# Altium PCB PCB.PcbDoc
Units mm, origin at the board's own origin, x right, y up, seen from the top; angles counter-clockwise.
Board outline 78.9 x 50.1 mm, 2 copper layers (Top Layer, Bottom Layer); 36 components, 42 nets, 144 pads, 0 vias.
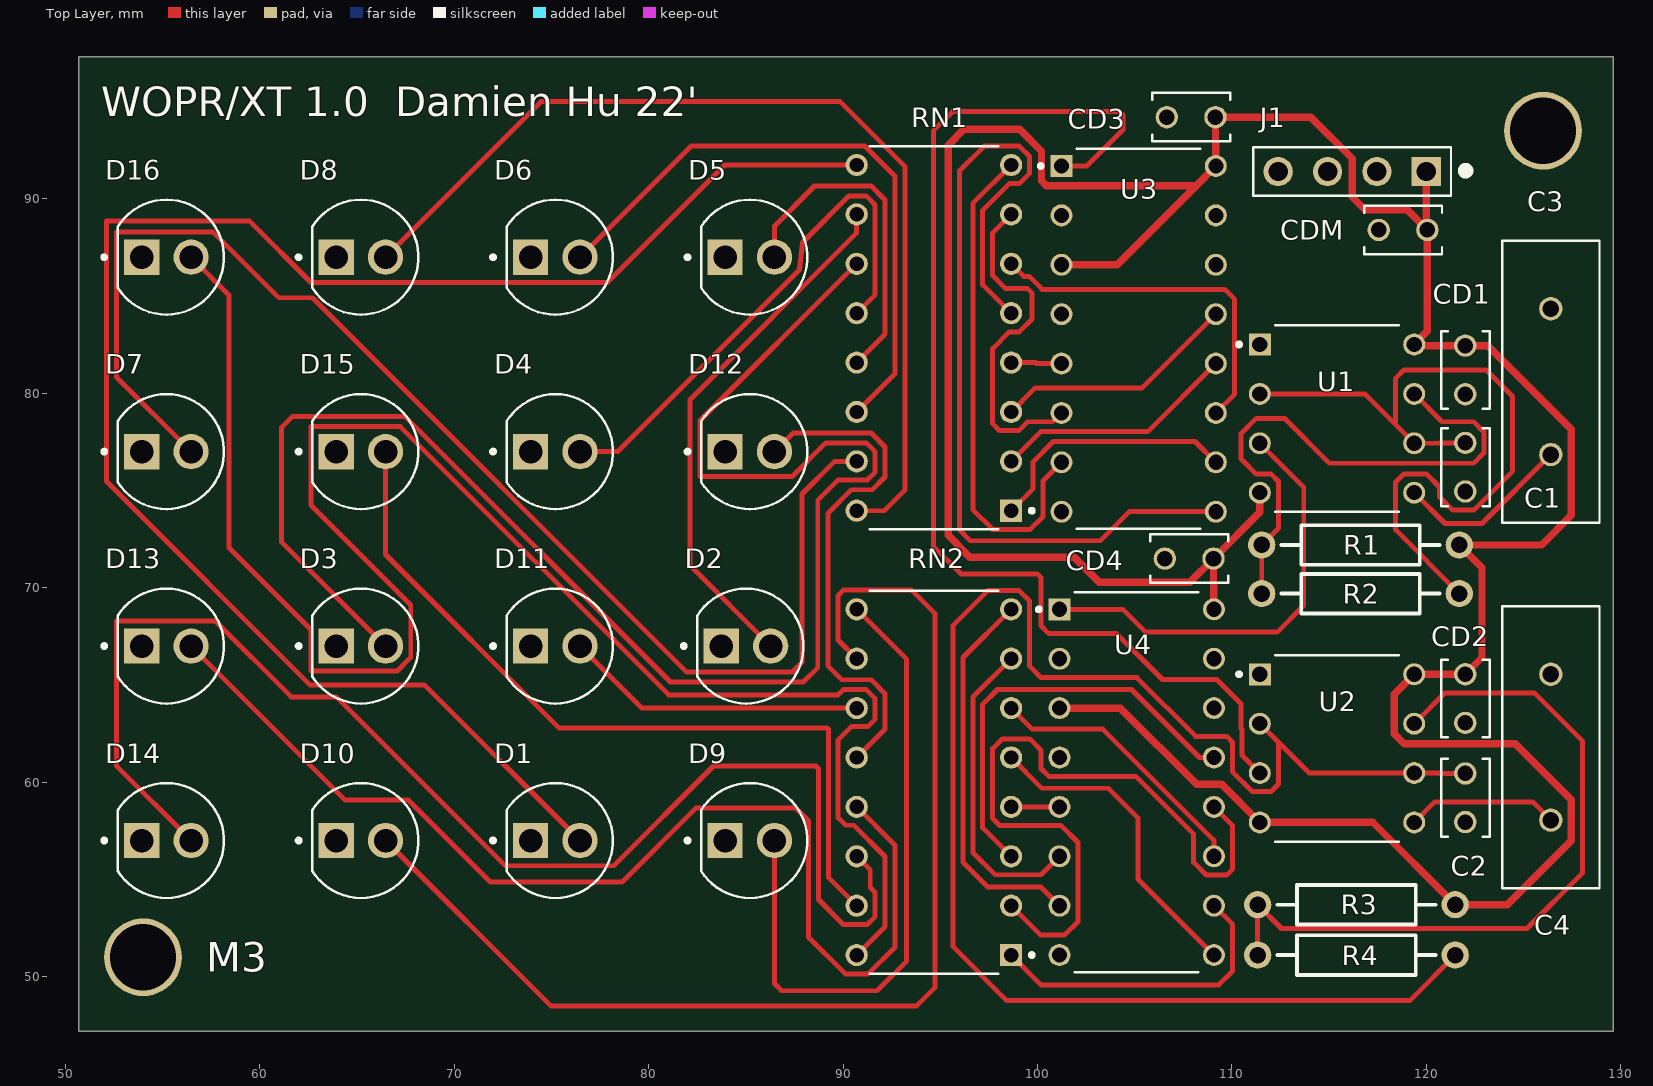
[diagram p0: Top Layer view]
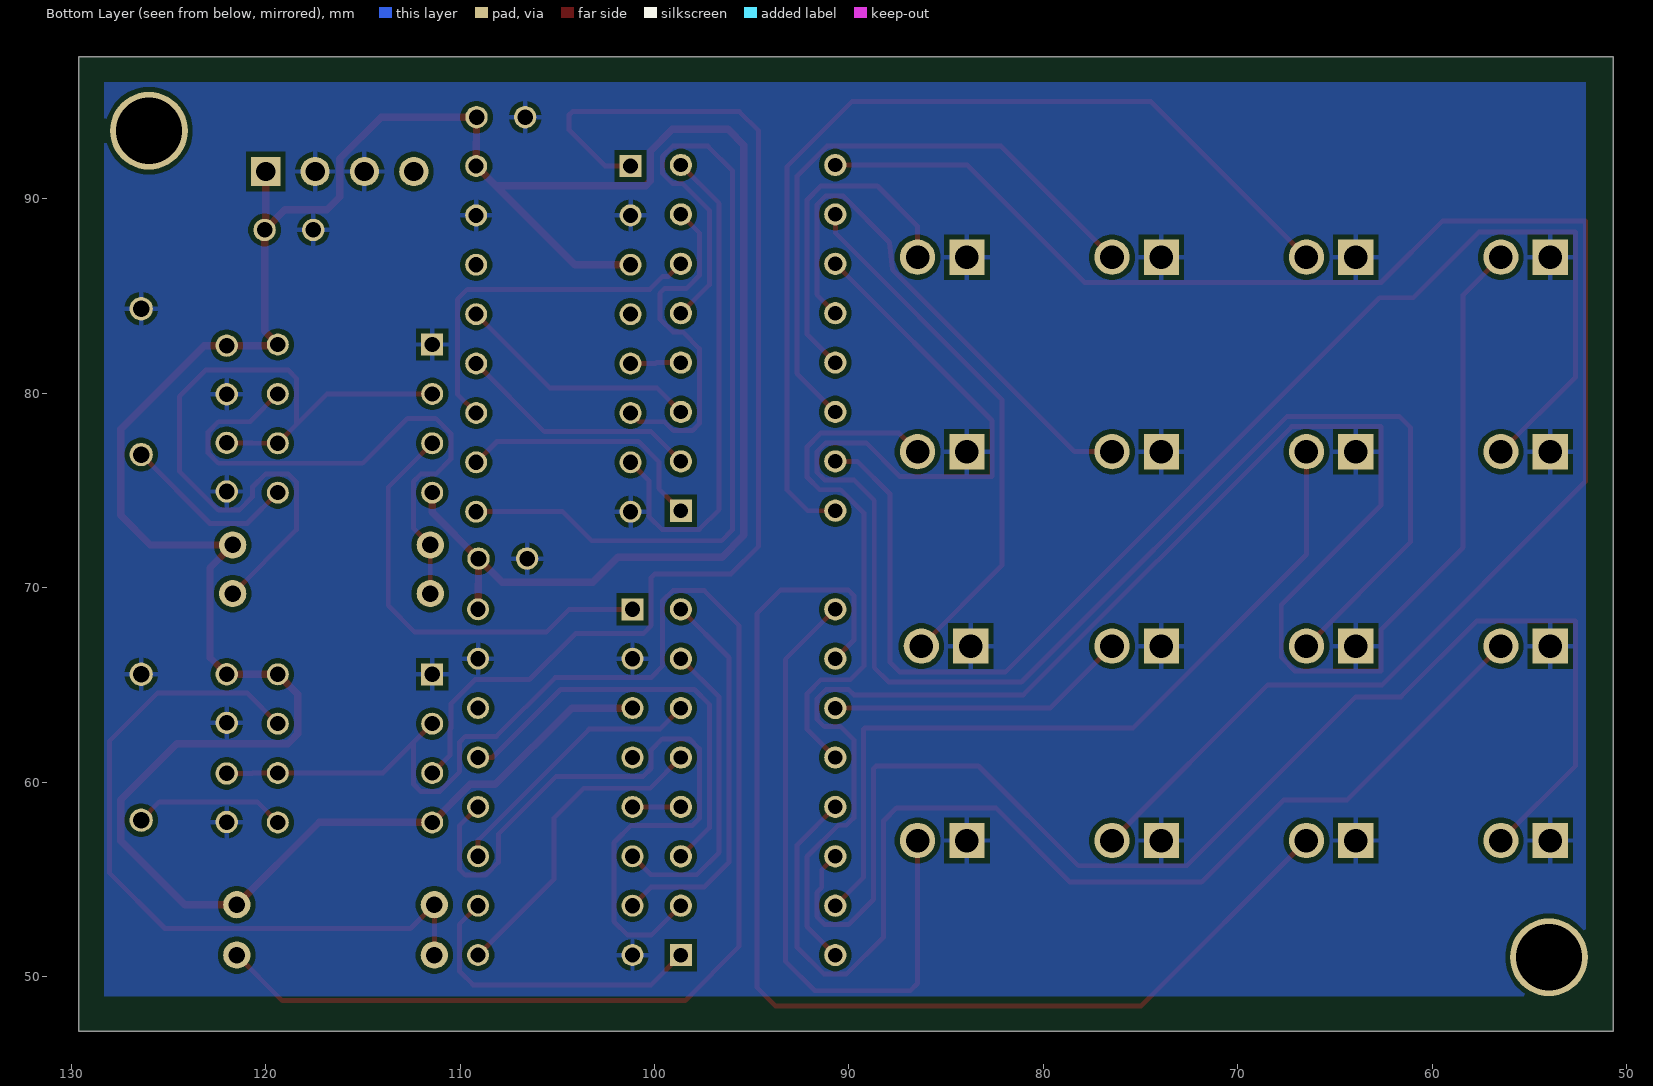
[diagram p1: Bottom Layer view, seen from below]

## Layer stack, top to bottom
Top Solder: solder mask 0.0102, Solder Resist, Dk 3.5
Top Layer: signal copper 0.0356
Dielectric 1: dielectric 0.32, FR-4, Dk 4.8
Bottom Layer: signal copper 0.0356
Bottom Solder: solder mask 0.0102, Solder Resist, Dk 3.5

## Board outline
50.7,47.2 129.6,47.2 129.6,97.3 50.7,97.3

## Design rules (kind name [scope] priority, off if disabled: settings)
BoardOutlineClearance [All] p1: gap=0.2 ignorepadtopadclearanceinfootprint=FALSE except(0.4: Arc-SplitBarrior Arc-SplitContinuation Track-SplitBarrior Track-SplitContinuation SMDPad-SplitBarrior SMDPad-SplitContinuation THPad-SplitBarrior THPad-SplitContinuation Via-SplitBarrior Via-SplitContinuation Fill-SplitBarrior Fill-SplitContinuation Poly-SplitBarrior Poly-SplitContinuation Region-SplitBarrior Region-SplitContinuation Text-SplitBarrior Text-SplitContinuation)
Clearance "Clearance Bottom Layer" [OnLayer('Bottom Layer')] p1: gap=0.203 ignorepadtopadclearanceinfootprint=TRUE except(0.254: Arc-Text Track-Text SMDPad-Text THPad-Text Via-Text Fill-Text Poly-Text Region-Text Text-Text)
Clearance "Clearance Top Layer" [OnLayer('Top Layer')] p2: gap=0.203 ignorepadtopadclearanceinfootprint=TRUE except(0.254: Arc-Text Track-Text SMDPad-Text THPad-Text Via-Text Fill-Text Poly-Text Region-Text Text-Text)
Clearance [All] p3: gap=0.2 ignorepadtopadclearanceinfootprint=FALSE except(0.089: Arc-Arc Arc-Track Arc-SMDPad Track-Track Track-SMDPad SMDPad-SMDPad; 0.127: Arc-Via Track-Via SMDPad-Via THPad-Via Via-Via; 0.254: Arc-Text Track-Text SMDPad-Text THPad-Text Via-Text Fill-Text Poly-Text Region-Text Text-Text)
HoleSize [All] p1: absolutevalues=TRUE maxlimit=6.3 minlimit=0.2 maxpercent=80.000 minpercent=20.000
MinimumAnnularRing [All] p1: minimumring=0.076
MinimumSolderMaskSliver [All] p1: minsoldermaskwidth=0.1
PolygonConnect PolygonConnect_1 [All] p1: thpad.connectstyle=Relief thpad.reliefconductorwidth=0.508 thpad.reliefentries=4 thpad.polygonreliefangle="90 Angle" thpad.airgapwidth=0.254 smdpad.connectstyle=Relief smdpad.reliefconductorwidth=0.508 smdpad.reliefentries=4 smdpad.polygonreliefangle="90 Angle" smdpad.airgapwidth=0.254 via.connectstyle=Direct via.reliefconductorwidth=0.508 via.reliefentries=4 via.polygonreliefangle="90 Angle" via.airgapwidth=0.254
RoutingCorners [All] p1: cornerstyle=Round minsetback=2.54 maxsetback=2.54
RoutingVias [All] p1: holewidth=0.5 width=1 viastyle="Through Hole" minholewidth=0.2 minwidth=0.45 maxholewidth=1 maxwidth=2
SilkToSilkClearance [All] p1: silktosilkclearance=0.1
SilkToSolderMaskClearance [IsPad] p1: minsilkscreentomaskgap=0.1 clearancetoexposedcopper=TRUE
SolderMaskExpansion [All] p1: expansion=0.102 istentingtop=FALSE
Width [All] p1: maxlimit=2.54 minlimit=0.089 preferedwidth=0.381
25 further rules are at their usual default settings.

## Components (designator, comment, footprint, x,y, rotation, side; value= is the part's Value field where it differs from the comment)
C1 "FG18X7R1E105KRT00" CAPRB250W50L400T250H550 122,76.2 r270 top value="1 uF"
C2 "FG18X7R1E105KRT00" CAPRB250W50L400T250H550 122,59.2 r270 top value="1 uF"
C3 "CK45-E3DD103ZYGNA" CAPRB750W60L1450T500H1850 126.4,80.6 r270 top value="10 nF"
C4 "CK45-E3DD103ZYGNA" CAPRB750W60L1450T500H1850 126.4,61.8 r270 top value="10 nF"
CD1 "FG18X7R1H473KNT06" CAPRB250W50L400T250H550 122,81.2 r270 top
CD2 "FG18X7R1H473KNT06" CAPRB250W50L400T250H550 122,64.3 r270 top
CD3 "FG18X7R1H473KNT06" CAPRB250W50L400T250H550 107.9,94.2 r180 top
CD4 "FG18X7R1H473KNT06" CAPRB250W50L400T250H550 107.8,71.5 r180 top
CDM "FG18X7R1H473KNT06" CAPRB250W50L400T250H550 118.8,88.4 r180 top
D1 "L08R5000Q1" LEDRD254W57D500H1070 75.2,57 r0 top
D2 "L08R5000Q1" LEDRD254W57D500H1070 85.004,67 r0 top
D3 "L08R5000Q1" LEDRD254W57D500H1070 65.2,67 r0 top
D4 "L08R5000Q1" LEDRD254W57D500H1070 75.2,77 r0 top
D5 "L08R5000Q1" LEDRD254W57D500H1070 85.2,87 r0 top
D6 "L08R5000Q1" LEDRD254W57D500H1070 75.2,87 r0 top
D7 "L08R5000Q1" LEDRD254W57D500H1070 55.2,77 r0 top
D8 "L08R5000Q1" LEDRD254W57D500H1070 65.2,87 r0 top
D9 "L08R5000Q1" LEDRD254W57D500H1070 85.2,57 r0 top
D10 "L08R5000Q1" LEDRD254W57D500H1070 65.2,57 r0 top
D11 "L08R5000Q1" LEDRD254W57D500H1070 75.2,67 r0 top
D12 "L08R5000Q1" LEDRD254W57D500H1070 85.2,77 r0 top
D13 "L08R5000Q1" LEDRD254W57D500H1070 55.2,67 r0 top
D14 "L08R5000Q1" LEDRD254W57D500H1070 55.2,57 r0 top
D15 "L08R5000Q1" LEDRD254W57D500H1070 65.2,77 r0 top
D16 "L08R5000Q1" LEDRD254W57D500H1070 55.2,87 r0 top
J1 "826629-4" TE_826629-4 116.184,91.405 r180 top
R1 "Res2" AXIAL-0.4 116.61,72.2 r180 top value=1K
R2 "Res2" AXIAL-0.4 116.61,69.7 r0 top value=1K
R3 "Res2" AXIAL-0.4 116.4,53.7 r180 top value=1K
R4 "Res2" AXIAL-0.4 116.4,51.11 r0 top value=1K
RN1 "Resistor Net" DIP794W45P254L1969H508Q16#1 94.67,82.85 r180 top
RN2 "Resistor Net" DIP794W45P254L1969H508Q16#1 94.67,60 r180 top
U1 "NE555P" DIP794W45P254L959H508Q8 115.4,78.7 r0 top
U2 "NE555P" DIP794W45P254L959H508Q8 115.4,61.74 r0 top
U3 "CD4026BE" DIP794W45P254L1969H508Q16#2 105.2,82.8 r0 top
U4 "CD4026BE" DIP794W45P254L1969H508Q16#2 105.1,60 r0 top

## Footprints (in the part's own frame and the unit in brackets; to place one, negate y for a bottom-side part, rotate by r counter-clockwise, add the part's x,y. Pads: shape width x height; smd on the part's side, far side on the other; paste and mask are expansions set on the pad)
AXIAL-0.4 [mm] "Axial Device, Thru-Hole; 2 Leads; 0.4 in Pin Spacing"
  round 1.4 hole 0.85: 1(-5.08,0) 2(5.08,0)
  silkscreen extent -4.06,-1.02 4.06,1.02
CAPRB250W50L400T250H550 [mm]
  round 1.15 hole 0.8: 1(-1.25,0) 2(1.25,0)
  silkscreen extent -2,-1.25 2,1.25
CAPRB750W60L1450T500H1850 [mm]
  round 1.2 hole 0.85: 1(-3.75,0) 2(3.75,0)
  silkscreen extent -7.25,-2.5 7.25,2.5
DIP794W45P254L959H508Q8 [mm]
  rect 1.13x1.13 hole 0.78: 1(-3.97,3.81)
  round 1.13 hole 0.78: 2(-3.97,1.27) 3(-3.97,-1.27) 4(-3.97,-3.81) 5(3.97,-3.81) 6(3.97,-1.27) 7(3.97,1.27) 8(3.97,3.81)
  silkscreen extent -5.13,-4.79 3.18,4.8
DIP794W45P254L1969H508Q16#1 [mm]
  rect 1.14x1.14 hole 0.74: 1(-3.97,8.89)
  round 1.14 hole 0.74: 2(-3.97,6.35) 3(-3.97,3.81) 4(-3.97,1.27) 5(-3.97,-1.27) 6(-3.97,-3.81) 7(-3.97,-6.35) 8(-3.97,-8.89) 9(3.97,-8.89) 10(3.97,-6.35) 11(3.97,-3.81) 12(3.97,-1.27) 13(3.97,1.27) 14(3.97,3.81) 15(3.97,6.35) 16(3.97,8.89)
  silkscreen extent -5.13,-9.85 3.3,9.84, body extent -5.46,-9.65 5.46,9.65, height 5.08
DIP794W45P254L1969H508Q16#2 [mm]
  rect 1.13x1.13 hole 0.78: 1(-3.97,8.89)
  round 1.13 hole 0.78: 2(-3.97,6.35) 3(-3.97,3.81) 4(-3.97,1.27) 5(-3.97,-1.27) 6(-3.97,-3.81) 7(-3.97,-6.35) 8(-3.97,-8.89) 9(3.97,-8.89) 10(3.97,-6.35) 11(3.97,-3.81) 12(3.97,-1.27) 13(3.97,1.27) 14(3.97,3.81) 15(3.97,6.35) 16(3.97,8.89)
  silkscreen extent -5.13,-9.77 3.17,9.78
LEDRD254W57D500H1070 [mm]
  round 1.815 hole 1.21: A(1.27,0)
  rect 1.815x1.815 hole 1.21: C(-1.27,0)
  silkscreen extent -3.3,-2.96 2.96,2.96
TE_826629-4 [mm]
  rect 1.508x1.508 hole 1: 1(-3.81,0)
  round 1.508 hole 1: 2(-1.27,0) 3(1.27,0) 4(3.81,0)
  silkscreen extent -6.03,-1.25 5.08,1.25

## Part data
C1 C2: "COMMERCIAL GRADE, HALOGEN FREE DIPPED RADIAL / BULK", Package="Radial TDK Corporation", Check_prices=https://www.snapeda.com/parts/FG18X7R1E105KRT00/TDK/view-part/?ref=eda, Digi-Key_Part_Number=445-180204-ND, MF=TDK, MP=FG18X7R1E105KRT00, Purchase-URL=https://pricing.snapeda.com/search/part/FG18X7R1E105KRT00/?ref=eda, SnapEDA_Link=https://www.snapeda.com/parts/FG18X7R1E105KRT00/TDK/view-part/?ref=snap
C3 C4: "Cap Ceramic Single 0.01uF 2000V E -20% to 80% (14.5 X 5mm) Radial Disc 7.5mm 105Â°C Bag", Package=None, Check_prices=https://www.snapeda.com/parts/CK45E3DD103ZYGNA/TDK/view-part/?ref=eda, Digi-Key_Part_Number=445-175346-ND, MF=TDK, MP=CK45E3DD103ZYGNA, Purchase-URL=https://pricing.snapeda.com/search/part/CK45E3DD103ZYGNA/?ref=eda, SnapEDA_Link=https://www.snapeda.com/parts/CK45E3DD103ZYGNA/TDK/view-part/?ref=snap
CD1 CD2 CD3 CD4 CDM: "COMMERCIAL GRADE, HALOGEN FREE DIPPED RADIAL / AMMO PACK", Package="Radial TDK Corporation", Check_prices=https://www.snapeda.com/parts/FG18X7R1H473KNT06/TDK/view-part/?ref=eda, Digi-Key_Part_Number=445-173275-1-ND, MF=TDK, MP=FG18X7R1H473KNT06, Purchase-URL=https://pricing.snapeda.com/search/part/FG18X7R1H473KNT06/?ref=eda, SnapEDA_Link=https://www.snapeda.com/parts/FG18X7R1H473KNT06/TDK/view-part/?ref=snap
D1 D2 D3 D4 D5 D6 D7 D8 D9 D10 D11 D12 D13 D14 D15 D16: "LED, Orange, Through Hole, T-1 3/4 (5mm), 30 mA, 2.1 V, 635 nm", Package=None, Availability=Unavailable, MP=L08R5000Q1, Price=None
J1: "Conn Unshrouded Header HDR 4 POS 2.54mm Solder ST Thru-Hole Automotive Carton", Package=None, Availability=Unavailable, EU_RoHS_Compliance=Compliant, MF="TE Connectivity", MP=826629-4, Price=None, SnapEDA_Link=https://www.snapeda.com/parts/826629-4/TE%20Connectivity%20AMP%20Connectors/view-part/891255/?ref=snap, TE_purchase_URL=https://www.te.com/usa-en/product-826629-4.html?te_bu=Cor&te_type=disp&te_campaign=seda_glo_cor-seda-global-disp-prtnr-fy19-seda-model-bom-cta_sma-317_1&elqCampaignId=32493
R1 R2 R3 R4: "Resistor", LatestRevisionDate=17-Jul-2002, LatestRevisionNote="Re-released for DXP Platform.", PackageDescription="Axial Device, Thru-Hole; 2 Leads; 0.4 in Pin Spacing", PackageReference=AXIAL-0.4, Published=8-Jun-2000, Publisher="Altium Limited"
RN1 RN2: library part 4116R-1-511LF, "Resistor net, 510Ohm, 2%, 2.25W. 16Pin DIP Thru Hole. 8 Resistors."
U1 U2: Package=None, Availability=Unavailable, MP=NE555P, Price=None
U3 U4: "CMOS Decade Counter/Divider with Decoded 7-Segment Display Outputs and Display Enable 16-PDIP -55 to 125", Package="PDIP-16 Texas Instruments", Availability=Good, BuyPart=https://www.snapeda.com/parts/CD4026BE/Texas%20Instruments/view-part/779031/?ref=eda, DigiKey-Purchase-URL=https://snapeda.com/shop?store=DigiKey&id=779031, MF="Texas Instruments", Mouser-Purchase-URL=https://snapeda.com/shop?store=Mouser&id=779031, MP=CD4026BE, Price=None, SnapEDA_Link=https://www.snapeda.com/parts/CD4026BE/Texas%20Instruments/view-part/779031/?ref=snap, Texas_Instruments-Purchase-URL=https://snapeda.com/shop?store=Texas+Instruments&id=779031

## Free pads (board coordinates)
  round 4 hole 3.4: 3(54,51) 4(126,93.5)

## Nets (pads, with @x,y where several pads share a name; then routed paths per layer and width w, separated by ;. In a path a pad name is that pad's centre, name@x,y a point inside that pad or via, vN(x,y) a via of type N, cw(c..) or ccw(c..) an arc to the next point about the centre after c; other vN are vias at no path point)
CLK1: U2.3 U3.1 | length 60.9
  Top Layer w0.254: U3.1 102.536,91.69 104.394,93.548 104.394,94.31 104.216,94.488 95.631,94.488 94.644,93.501 94.644,72.136 96.067,70.713 99.984,70.713 100.178,70.519 100.178,68.047 100.584,67.64 104.064,67.64 106.426,65.278 109.22,65.278 110.465,64.033 110.465,62.784 110.524,62.724 110.524,61.376 U2.3
CLK2: U1.3 U4.1 | length 22.9
  Top Layer w0.254: U4.1 104.389,68.89 105.562,67.716 112.319,67.716 113.69,69.088 113.69,75.17 U1.3
DSCH1: R1.2 R2.1 U1.7 | length 29.3
  Top Layer w0.254: R2.1 R1.2 112.395,73.065 112.395,75.463 112.014,75.844 111.252,75.844 110.465,76.632 110.465,77.927 111.252,78.715 112.7,78.715 115.011,76.403 122.428,76.403 122.961,76.937 122.961,78.003 122.428,78.537 120.803,78.537 U1.7
DSCH2: R3.2 R4.1 U2.7 | length 38.1
  Top Layer w0.254: R4.1 R3.2 112.544,52.476 125.171,52.476 128.016,55.321 128.016,62.128 125.552,64.592 120.952,64.592 U2.7
GND: C1.2 C2.2 C3.1 C4.1 CD1.2 CD2.2 CD3.2 CD4.2 CDM.2 D1.C D2.C D3.C D4.C D5.C D6.C D7.C D8.C D9.C D10.C D11.C D12.C D13.C D14.C D15.C D16.C J1.2 J1.3 U1.1 U2.1 U3.2 U3.8 U3.15 U4.2 U4.8 U4.15
LED1: D1.A RN1.9 | length 87.8
  Top Layer w0.254: D1.A 68.461,65.009 62.582,65.009 52.121,75.469 52.121,88.849 59.487,88.849 62.636,85.7 77.876,85.7 83.917,91.74 RN1.9
LED2: D2.A RN1.10 | length 27.5
  Top Layer w0.254: D2.A 82.133,71.141 82.133,79.681 90.7,88.248 RN1.10
LED3: D3.A RN1.11 | length 84.7
  Top Layer w0.254: D3.A 61.112,72.358 61.112,78.232 61.697,78.816 67.462,78.816 81.128,65.151 87.96,65.151 88.697,65.888 88.697,74.498 89.748,75.549 91.254,75.549 91.651,75.946 91.651,76.986 91.186,77.451 89.116,77.451 87.376,75.711 82.641,75.711 82.641,78.601 RN1.11
LED4: D4.A RN1.12 | length 27.5
  Top Layer w0.254: D4.A 78.397,77 87.757,86.36 87.909,87.754 90.306,90.151 91.186,90.151 91.651,89.686 91.651,85.071 RN1.12
LED5: D5.A RN1.13 | length 17.4
  Top Layer w0.254: D5.A 86.47,88.596 88.533,90.659 91.44,90.659 92.159,89.94 92.159,83.039 RN1.13
LED6: D6.A RN1.14 | length 32.1
  Top Layer w0.254: D6.A 82.18,92.71 91.124,92.71 92.667,91.167 92.667,81.007 RN1.14
LED7: D7.A RN1.15 | length 69.9
  Top Layer w0.254: D7.A 52.629,80.841 52.629,88.29 57.607,88.29 60.985,84.912 62.713,84.912 81.966,65.659 87.376,65.659 87.884,66.167 87.884,74.821 89.563,76.5 RN1.15
LED8: D8.A RN1.16 | length 51
  Top Layer w0.254: D8.A 74.466,94.996 89.854,94.996 93.175,91.675 93.175,75.014 92.121,73.96 RN1.16
LED9: D9.A RN2.9 | length 34.1
  Top Layer w0.254: D9.A 86.47,49.649 86.843,49.276 91.745,49.276 93.269,50.8 93.269,66.321 RN2.9
LED10: D10.A RN2.10 | length 60.6
  Top Layer w0.254: D10.A 74.97,48.5 93.788,48.5 94.717,49.428 94.717,68.682 93.523,69.875 90.018,69.875 89.738,69.596 89.738,67.312 RN2.10
LED11: D11.A RN2.11 | length 15.6
  Top Layer w0.254: D11.A 79.66,63.81 RN2.11
LED12: D12.A RN2.12 | length 26.9
  Top Layer w0.254: D12.A 87.429,77.959 91.44,77.959 92.159,77.24 92.159,75.692 91.508,75.041 90.424,75.041 89.23,73.847 89.23,65.964 89.925,65.269 91.44,65.269 92.159,64.55 92.159,62.729 RN2.12
LED13: D13.A RN2.13 | length 58.4
  Top Layer w0.254: D13.A 64.39,59.08 67.648,59.08 71.866,54.862 78.63,54.862 82.445,58.677 87.551,58.677 88.225,58.003 88.225,52.034 90.119,50.14 91.288,50.14 92.667,51.519 92.667,56.763 RN2.13
LED14: D14.A RN2.14 | length 70.2
  Top Layer w0.254: D14.A 52.629,60.841 52.629,68.301 57.703,68.301 61.615,64.389 63.932,64.389 72.619,55.702 78.207,55.702 83.337,60.833 88.597,60.833 88.733,60.697 88.733,53.964 90.018,52.68 91.245,52.68 91.651,53.086 91.651,54.331 91.397,54.585 91.397,55.493 RN2.14
LED15: D15.A RN2.15 | length 41.5
  Top Layer w0.254: D15.A 66.47,71.706 75.38,62.796 89.174,62.796 89.241,62.729 89.241,55.109 RN2.15
LED16: D16.A RN2.16 | length 94.6
  Top Layer w0.254: D16.A 58.42,85.05 58.42,72.06 62.636,67.843 62.636,65.71 67.056,65.71 67.767,66.421 67.767,69.113 62.636,74.244 62.636,78.289 67.228,78.289 81.026,64.491 89.738,64.491 90.009,64.761 91.186,64.761 91.651,64.296 91.651,63.246 91.264,62.859 90.424,62.859 89.749,62.184 89.749,58.166 90.13,57.785 90.551,57.785 92.159,56.177 92.159,52.569 RN2.16
MSW: CD1.1 CD2.1 CD3.1 CD4.1 CDM.1 J1.1 R1.1 R3.1 U1.4 U1.8 U2.4 U2.8 U3.3 U3.16 U4.3 U4.16 | length 172.4
  Top Layer w0.381: U4.3 104.259,63.81 108.179,59.89 109.47,59.89 U2.4 117.25,57.93 R3.1 124.147,53.7 127.444,56.998 127.444,59.106 124.574,61.976 118.847,61.976 118.339,62.484 118.339,64.519 U2.8 CD2.1 122.86,66.41 122.86,71.03 R1.1 125.921,72.2 127.457,73.736 127.457,78.156 123.163,82.45 CD1.1 119.43,82.45 U1.8 120.05,83.19 CDM.1 ; U3.3 104.09,86.61 108.158,90.678 ; U4.16 109.07,70.18 109.05,70.2 CD4.1 ; U1.4 111.43,73.88 CD4.1 ; J1.1 119.994,88.456 CDM.1 ; 108.158,90.678 U3.16 109.17,92.913 109.15,92.933 CD3.1 114.055,94.2 116.18,92.075 116.18,90.094 116.84,89.433 119.017,89.433 CDM.1 ; 108.158,90.678 100.457,90.678 100.203,90.932 100.203,92.456 99.085,93.574 96.215,93.574 95.402,92.761 95.402,72.695 96.52,71.577 101.879,71.577 103.175,70.282 107.832,70.282 CD4.1
NetC3_2: C3.2 U1.5 | length 9.2
  Top Layer w0.254: U1.5 120.956,73.304 122.854,73.304 C3.2
NetC4_2: C4.2 U2.5 | length 7.9
  Top Layer w0.254: U2.5 120.426,58.986 125.464,58.986 C4.2
RN1A: RN1.1 U3.10 | length 13.3
  Top Layer w0.254: RN1.1 99.771,75.091 99.771,76.479 100.813,77.521 108.099,77.521 U3.10
RN2A: RN1.2 U3.12 | length 12.6
  Top Layer w0.254: RN1.2 100.169,78.029 105.669,78.029 U3.12
RN3A: RN1.3 U3.13 | length 12.6
  Top Layer w0.254: RN1.3 99.864,80.264 105.364,80.264 U3.13
RN4A: RN1.4 U3.5 | length 2.6
  Top Layer w0.254: RN1.4 99.898,81.58 99.948,81.53 U3.5
RN5A: RN1.5 U3.9 | length 46.8
  Top Layer w0.254: RN1.5 97.181,85.579 97.181,89.409 98.552,90.78 99.06,90.78 99.591,91.311 99.591,92.179 99.06,92.71 97.257,92.71 95.987,91.44 95.987,72.974 96.545,72.415 103.226,72.415 104.72,73.91 U3.9
RN6A: RN1.6 U3.11 | length 18.5
  Top Layer w0.254: RN1.6 99.289,86.011 99.571,86.011 100.239,85.344 109.626,85.344 110.134,84.836 110.134,79.954 U3.11
RN7A: RN1.7 U3.6 | length 17.9
  Top Layer w0.254: RN1.7 97.689,88.249 97.689,86.055 98.349,85.395 99.466,85.395 99.72,85.141 99.72,83.82 99.06,83.16 98.552,83.16 97.688,82.296 97.688,78.435 98.044,78.08 99.035,78.08 99.492,78.537 100.777,78.537 U3.6
RN8A: RN1.8 U3.7 | length 26
  Top Layer w0.254: RN1.8 96.673,89.773 96.673,74.015 97.688,73 99.619,73 100.279,73.66 100.279,75.499 U3.7
RN9A: RN2.1 U4.10 | length 16.1
  Top Layer w0.254: RN2.1 100.169,49.581 109.322,49.581 110.033,50.292 110.033,52.687 U4.10
RN10A: RN2.2 U4.12 | length 37.5
  Top Layer w0.254: RN2.2 100.144,52.146 101.397,52.146 102.083,52.832 102.083,56.896 101.2,57.779 98.044,57.779 97.689,58.134 97.689,61.723 98.196,62.23 99.593,62.23 100.178,61.646 100.178,60.706 100.584,60.3 105.054,60.3 108.026,57.328 108.026,55.88 108.687,55.22 109.728,55.22 110.033,55.524 110.033,57.767 U4.12
RN11A: RN2.3 U4.13 | length 22.1
  Top Layer w0.254: RN2.3 97.181,57.649 97.181,64.009 97.942,64.77 104.831,64.77 108.331,61.27 U4.13
RN12A: RN2.4 U4.5 | length 2.5
  Top Layer w0.254: RN2.4 U4.5
RN13A: RN2.5 U4.9 | length 16.5
  Top Layer w0.254: RN2.5 100.22,59.69 103.632,59.69 105.156,58.166 105.156,55.024 U4.9
RN14A: RN2.6 U4.11 | length 14.1
  Top Layer w0.254: RN2.6 99.721,62.729 103.362,62.729 109.07,57.021 U4.11
RN15A: RN2.7 U4.6 | length 16.1
  Top Layer w0.254: RN2.7 96.673,64.383 96.673,56.387 97.821,55.239 100.179,55.239 U4.6
RN16A: RN2.8 U4.7 | length 19.9
  Top Layer w0.254: RN2.8 96.165,66.415 96.165,55.88 97.435,54.61 100.17,54.61 U4.7
TRIG1: C1.1 R2.2 U1.2 U1.6 | length 39.8
  Top Layer w0.254: U1.2 116.83,79.97 118.415,78.385 ; R2.2 118.415,72.975 118.415,75.438 118.821,75.844 120.015,75.844 120.675,75.184 120.675,74.676 121.361,73.99 122.428,73.99 124.435,75.997 124.435,79.832 123.063,81.204 118.847,81.204 118.415,80.772 118.415,78.385 ; C1.1 120.67,77.45 120.65,77.43 U1.6 118.415,78.385
TRIG2: C2.1 R4.2 U2.2 U2.6 | length 83
  Top Layer w0.254: U2.2 112.395,62.045 ; R4.2 119.138,48.768 98.425,48.768 95.656,51.537 95.656,68.072 97.434,69.85 99.06,69.85 99.593,69.317 99.593,65.964 100.178,65.38 105.105,65.38 108.128,62.357 109.728,62.357 110.016,62.069 110.016,60.546 111.038,59.524 112.014,59.524 112.395,59.905 112.395,62.045 ; C2.1 120.67,60.45 120.65,60.47 U2.6 113.97,60.47 112.395,62.045
pads on no net: J1.4 U3.4 U3.14 U4.4 U4.14

## Polygon pours and split planes (outlines as drawn)
GND on Bottom Layer "GND_L02_P000" (solid, pour order 0): 128.3,96 128.3,49 52.1,49 52.1,96

## Silkscreen, mask and mechanical layers (free items; w line width, h text height)
Top Overlay:
  text "WOPR/XT 1.0  Damien Hu 22'" at 51.854,94.254 h1.52
  text "M3" at 57.254,50.254 h1.52